# Altium PCB PCB1.PcbDoc
Units mil, origin at the board's own origin, x right, y up, seen from the top; angles counter-clockwise.
Board outline 1181.1 x 984.25 mil, 2 copper layers (Top Layer, Bottom Layer); 18 components, 19 nets, 54 pads, 1 vias.
Unrouted connection lines stored in the file: 1.
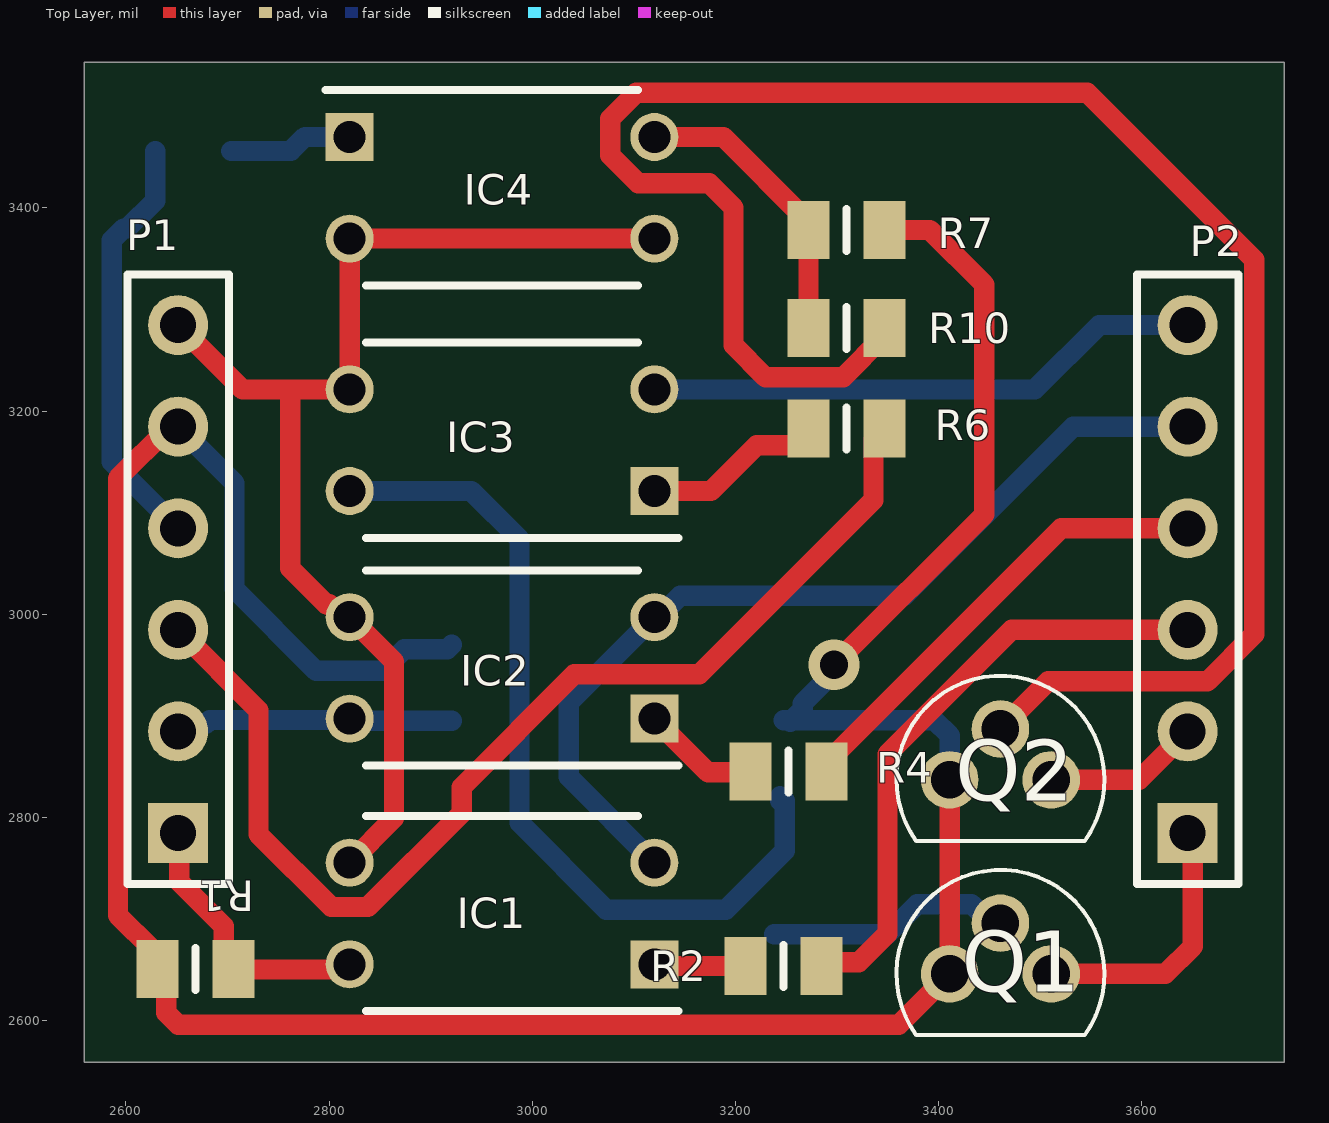
[diagram p0: Top Layer view]
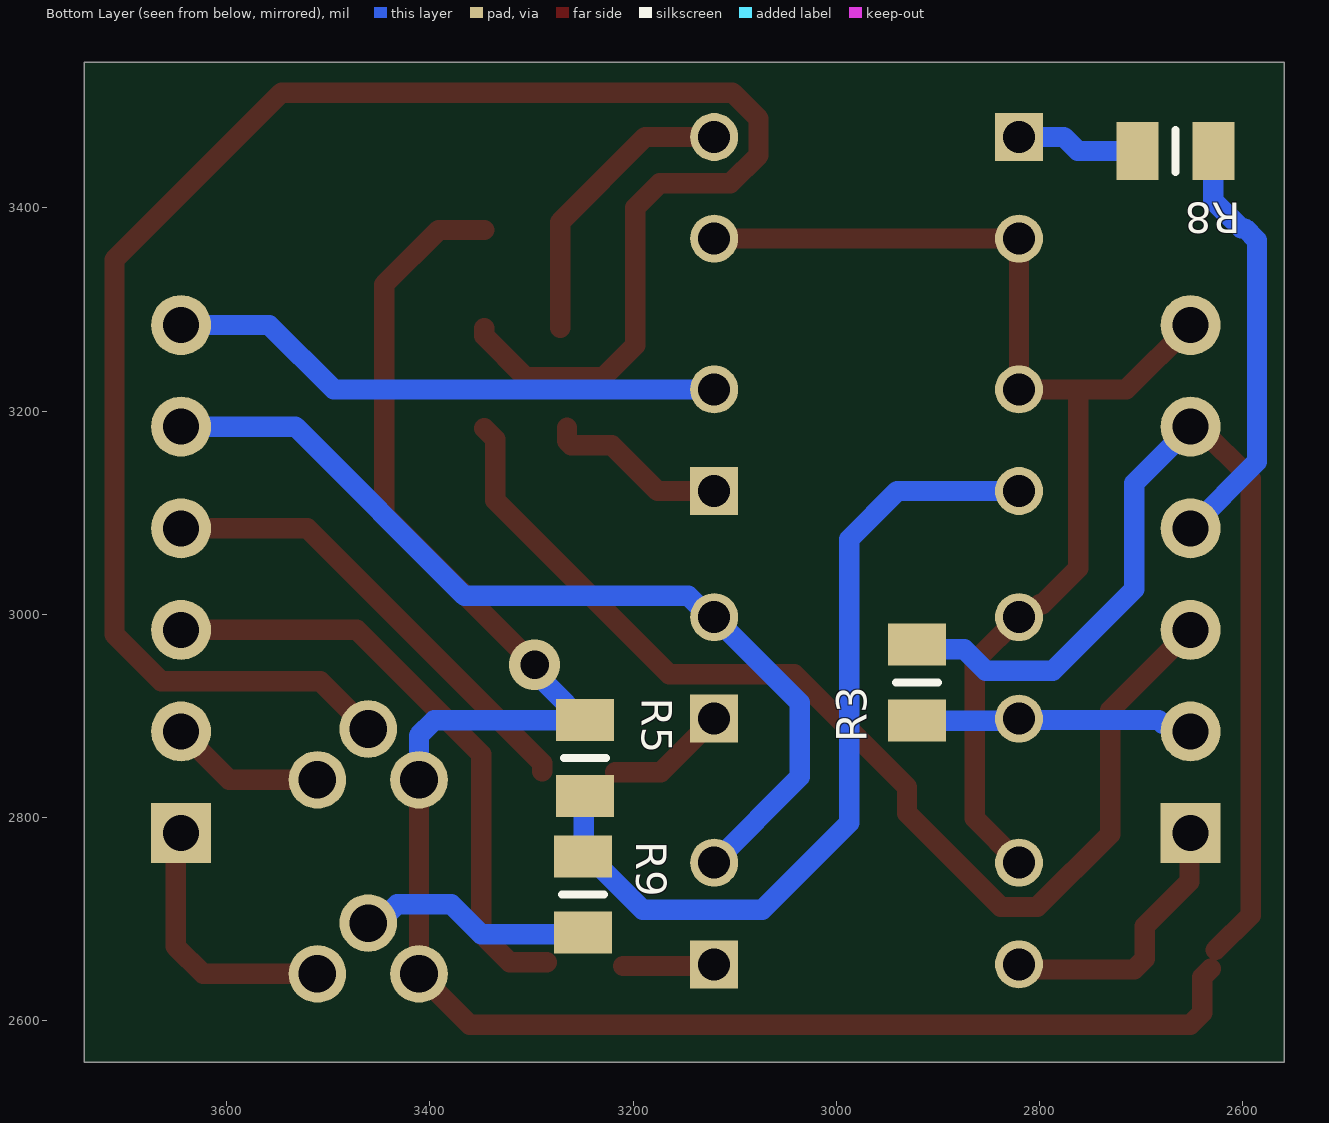
[diagram p1: Bottom Layer view, seen from below]
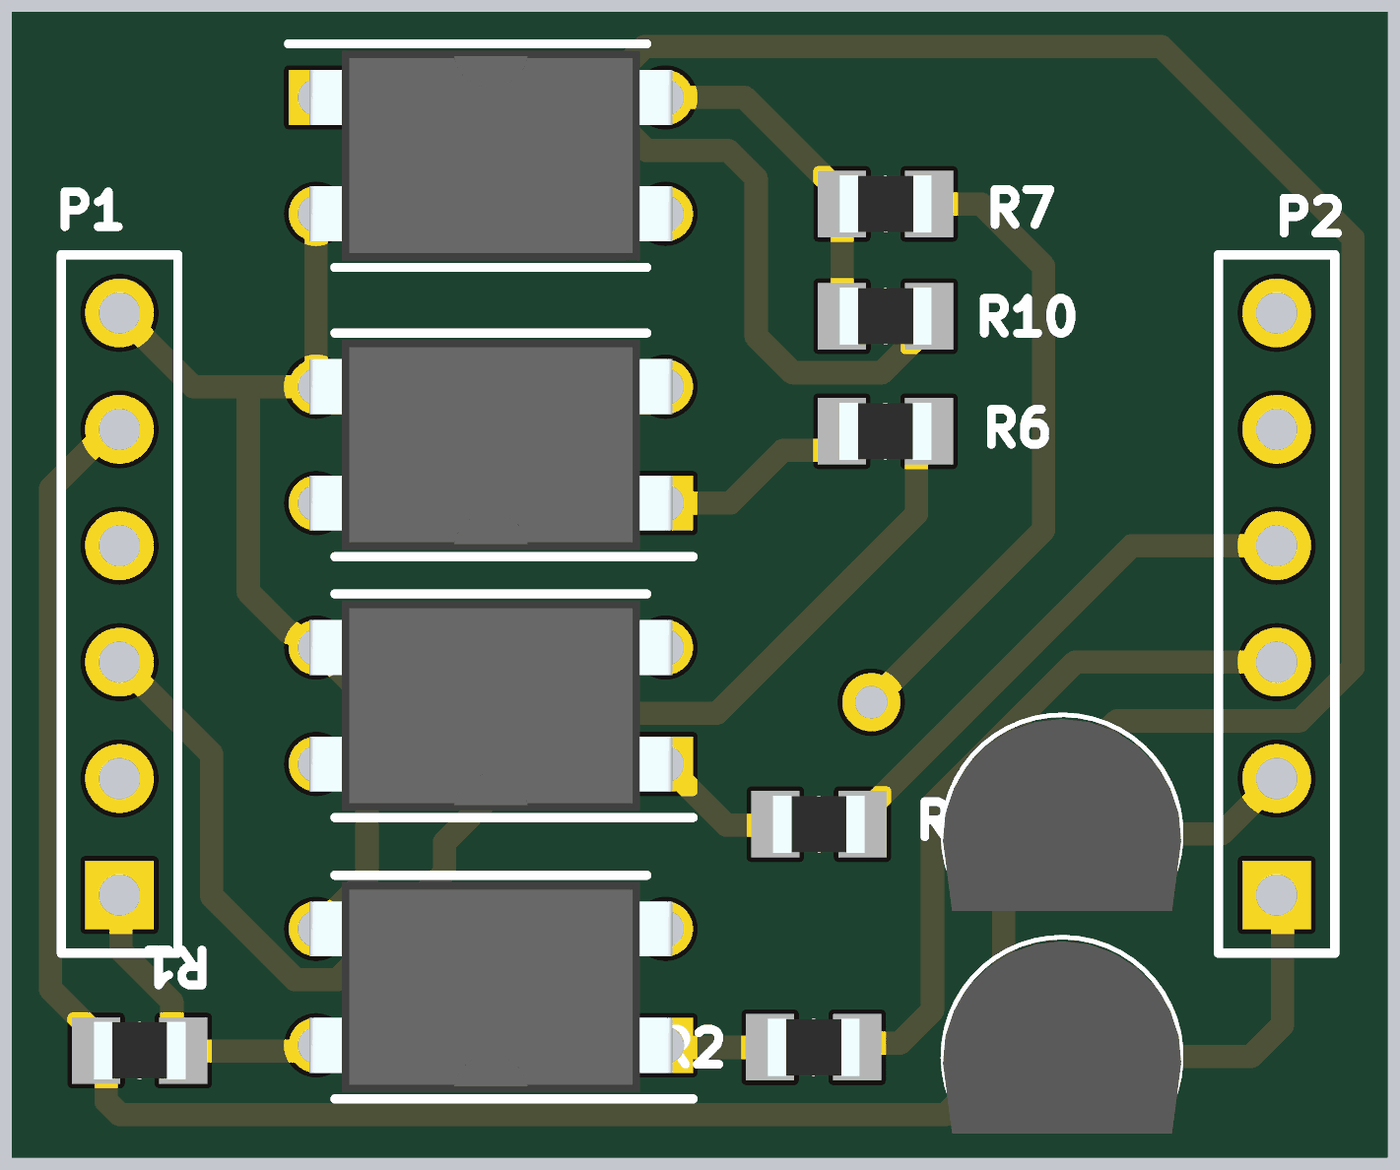
[diagram p2: 3D render of the assembled board from above, using the file's embedded part models]
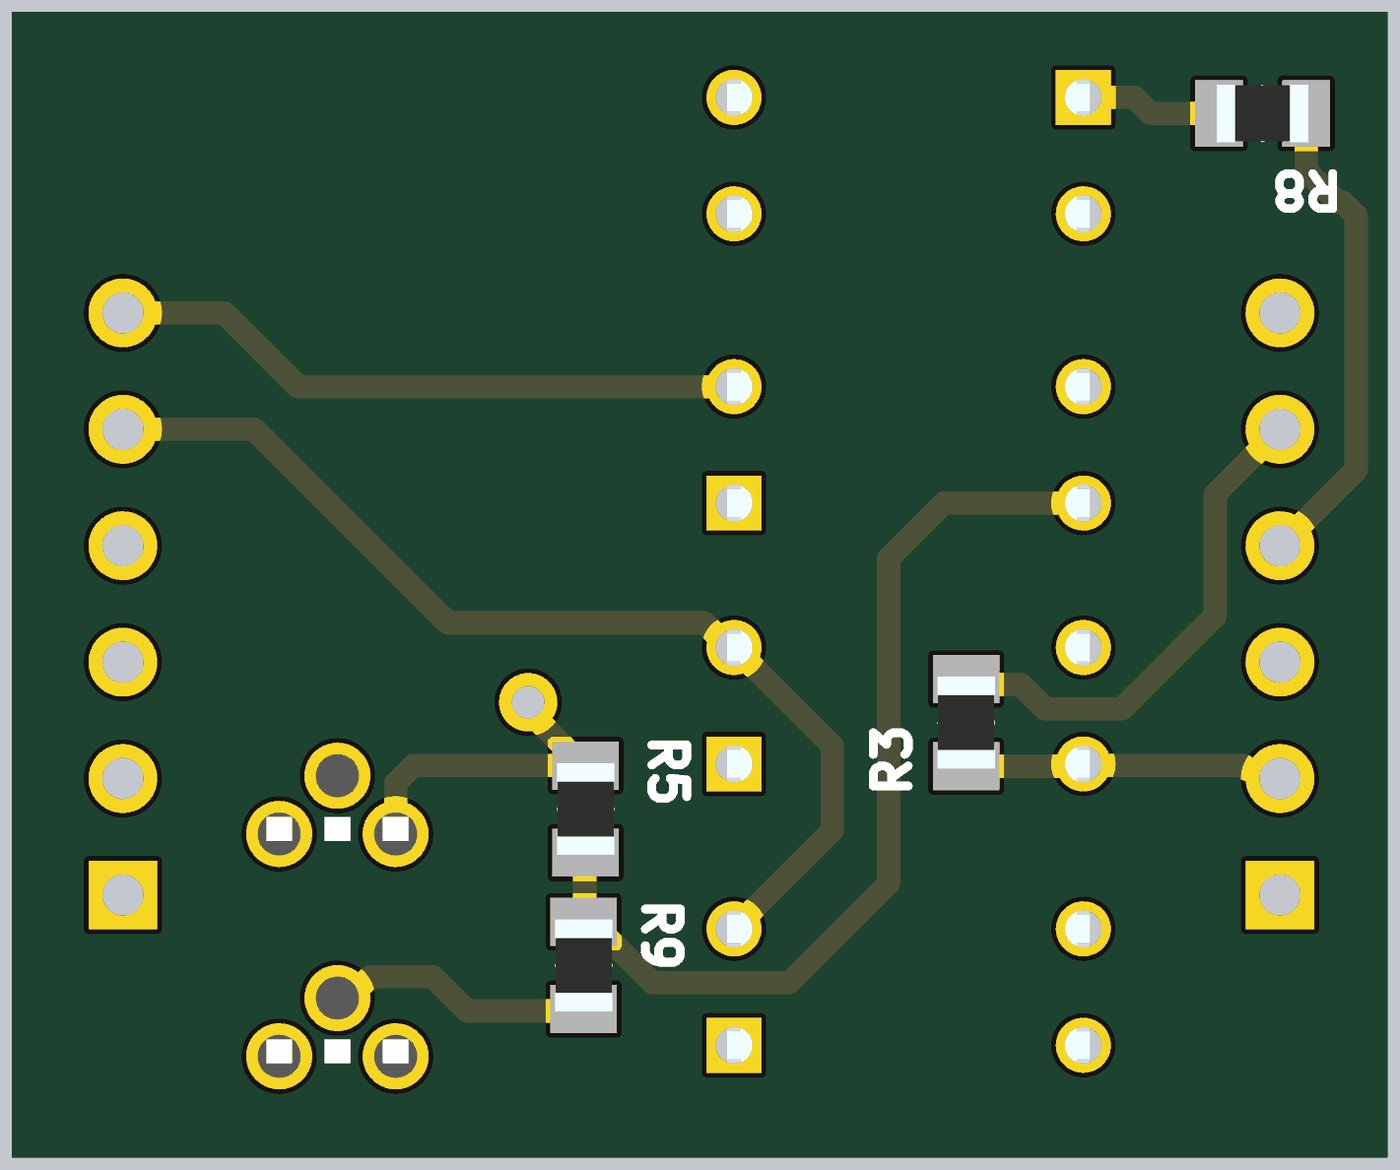
[diagram p3: 3D render of the assembled board from below, using the file's embedded part models]

## Layer stack, top to bottom
Top Solder: solder mask 0.4, Solder Resist, Dk 3.5
Top Layer: signal copper 1.4
Dielectric 1: dielectric 12.6, FR-4, Dk 4.8
Bottom Layer: signal copper 1.4
Bottom Solder: solder mask 0.4, Solder Resist, Dk 3.5

## Board outline
2559.06,2559.06 2559.06,3543.31 3740.16,3543.31 3740.16,2559.06

## Design rules (kind name [scope] priority, off if disabled: settings)
Clearance [All] p1: gap=10 ignorepadtopadclearanceinfootprint=FALSE except(0: Arc-Hole Track-Hole SMDPad-Hole THPad-Hole Via-Hole Fill-Hole Poly-Hole Region-Hole Text-Hole)
PolygonConnect [All] p1: connectstyle=Relief reliefconductorwidth=10 reliefentries=4 polygonreliefangle="90 Angle" airgapwidth=10
RoutingVias [All] p1: holewidth=28 width=50 viastyle="Through Hole" minholewidth=28 minwidth=50 maxholewidth=28 maxwidth=50
SolderMaskExpansion [All] p1: expansion=4 istentingtop=FALSE
Width [All] p1: maxlimit=30 minlimit=10 preferedwidth=20
30 further rules are at their usual default settings.

## Components (designator, comment, footprint, x,y, rotation, side; value= is the part's Value field where it differs from the comment)
IC1 "PC817X2NSZ0F" DIP762W60P254L458H400Q4N 2970.2,2705.57 r180 top
IC2 "PC817X2NSZ0F" DIP762W60P254L458H400Q4N 2970.2,2947.25 r180 top
IC3 "PC817X2NSZ0F" DIP762W60P254L458H400Q4N 2970.2,3171.35 r180 top
IC4 "PC817X2NSZ0F" DIP762W60P254L458H400Q4N 2970.2,3419.82 r0 top
P1 "Header 6" HDR1X6 2651.35,2784.71 r90 top
P2 "Header 6" HDR1X6 3644.99,2784.71 r90 top
Q1 "BC547BG" TO-92_(TO-226) 3410.74,2646.08 r180 top
Q2 "BC547BG" TO-92_(TO-226) 3410.74,2837.1 r180 top
R1 "RN73C2A10KLTDF" RESC2012X65N 2668.72,2651.06 r180 top
R2 "PCF0805R-1K0BI" RESC2012X65N 3247.43,2653.8 r180 top
R3 "RN73C2A10KLTDF" RESC2012X65N 2920.82,2932.71 r90 bottom
R4 "PCF0805R-1K0BI" RESC2012X65N 3251.93,2845.46 r180 top
R5 "RN73C2A10KLTDF" RESC2012X65N 3247.59,2858.44 r90 bottom
R6 "PCF0805R-1K0BI" RESC2012X65N 3309.05,3183.06 r180 top
R7 "RN73C2A10KLTDF" RESC2012X65N 3309.19,3378.27 r0 top
R8 "PCF0805R-1K0BI" RESC2012X65N 2666.32,3456.04 r0 bottom
R9 "PCF0805R-1K0BI" RESC2012X65N 3249.28,2724.19 r270 bottom
R10 "PCF0805R-1K0BI" RESC2012X65N 3309.19,3281.86 r0 top

## Footprints (in the part's own frame and the unit in brackets; to place one, negate y for a bottom-side part, rotate by r counter-clockwise, add the part's x,y. Pads: shape width x height; smd on the part's side, far side on the other; paste and mask are expansions set on the pad)
DIP762W60P254L458H400Q4N [mm]
  rect 1.2x1.2 hole 0.8: 1(-3.81,1.27)
  round 1.2 hole 0.8: 2(-3.81,-1.27) 3(3.81,-1.27) 4(3.81,1.27)
  silkscreen extent -4.41,-2.44 3.4,2.44, body extent -3.96,-2.29 3.96,2.29, height 4
HDR1X6 [mm] "Connector; Header; 6 Position"
  rect 1.5x1.5 hole 0.9: 1(0,0)
  round 1.5 hole 0.9: 2(2.54,0) 3(5.08,0) 4(7.62,0) 5(10.16,0) 6(12.7,0)
  silkscreen extent -1.27,-1.27 13.97,1.27
RESC2012X65N [mm]
  rect 1.05x1.45 smd: 1(-0.95,0) 2(0.95,0)
  silkscreen extent 0,-0.53 0,0.53, body extent -1,-0.63 1,0.63, height 0.65
TO-92_(TO-226) [mm]
  round 1.44 hole 0.94: 1(0,0) 2(-1.27,-1.27) 3(-2.54,0)
  silkscreen extent -3.87,-2.6 1.33,1.53, body extent -3.87,-2.51 1.33,1.68, height 8.33

## Part data
IC1 IC2 IC3 IC4: "Integrated Circuit", Manufacturer_Name="Sharp Microelectronics", Mouser Part Number=N/A, Datasheet Link=https://datasheet.datasheetarchive.com/originals/distributors/Datasheets_SAMA/458e45842a103a05998fcebbd6f7366e.pdf, Height=4mm, Manufacturer_Part_Number=PC817X2NSZ0F, Mouser Price/Stock=https://www.mouser.co.uk/ProductDetail/Sharp-Microelectronics/PC817X2NSZ0F?qs=6kT3pPPHxnU7uYWM8Yy85A%3D%3D
P1 P2: "Header, 6-Pin", LatestRevisionDate=17-Jul-2002, LatestRevisionNote="Re-released for DXP Platform.", Publisher="Altium Limited"
Q1 Q2: "Transistor BJT NPN", Manufacturer_Name=onsemi, Mouser Part Number=N/A, Arrow Part Number=BC547BG, Arrow Price/Stock=http://www.arrow.com/en/products/bc547bg/on-semiconductor, Datasheet Link=https://www.onsemi.com/download/data-sheet/pdf/BC546-D.PDF, Height=5.33mm, Manufacturer_Part_Number=BC547BG, Mouser Price/Stock=http://www.mouser.com/Search/ProductDetail.aspx?qs=NSmgnqlvnz5NIKIycfR5CQ%3d%3d
R1 R3 R5 R7: "Resistor", Manufacturer_Name="TE Connectivity", Mouser Part Number=279-RN73C2A10KLTDF, Datasheet Link=http://docs-europe.electrocomponents.com/webdocs/1488/0900766b814885e5.pdf, Height=0.65mm, Manufacturer_Part_Number=RN73C2A10KLTDF, Mouser Price/Stock=https://www.mouser.co.uk/ProductDetail/TE-Connectivity-Holsworthy/RN73C2A10KLTDF?qs=1Hpg7qxOs69sC8pHBMR1GQ%3D%3D
R2 R4 R6 R8 R9 R10: "Resistor", Manufacturer_Name="TT Electronics", Mouser Part Number=756-PCF0805R1K0BI, Datasheet Link=https://componentsearchengine.com/Datasheets/1/PCF0805-13-10KBT1.pdf, Height=0.65mm, Manufacturer_Part_Number=PCF0805R-1K0BI, Mouser Price/Stock=https://www.mouser.co.uk/ProductDetail/Welwyn-Components-TT-Electronics/PCF0805R-1K0BI?qs=mbEfOQsdCzdnsA0Coprz5g%3D%3D

## Via types
v1: diameter 50, hole 28, Top Layer to Bottom Layer, 1 vias

## Nets (pads, with @x,y where several pads share a name; then routed paths per layer and width w, separated by ;. In a path a pad name is that pad's centre, name@x,y a point inside that pad or via, vN(x,y) a via of type N, cw(c..) or ccw(c..) an arc to the next point about the centre after c; other vN are vias at no path point)
+5: P1.5 Q1.1 Q2.1 R1.2 R3.2 R5.2 R7.2 | length 2869.7
  Top Layer w20: R1.2@2626.4,2669.66 2592.18,2703.89 2592.18,3133.77 2642.73,3184.32 P1.5@2646.29,3184.32 ; R1.2 2639.73,2642.64 2639.73,2607.84 2651.45,2596.13 3360.79,2596.13 3408.52,2643.86 Q1.1@3409.81,2643.86 ; v1(3296.92,2950.27) 3444.88,3098.23 3444.88,3324.68 3391.3,3378.27 R7.2 ; Q1.1 Q2.1
  Bottom Layer w20: P1.5 2706.9,3129.16 2706.9,3024.69 2787.03,2944.56 2853.07,2944.56 2873.99,2965.48 2916.18,2965.48 R3.2 ; R5.2 3395.69,2895.84 3410.74,2880.79 Q2.1 ; R5.2@3253.78,2894.15 3266.14,2906.51 3266.14,2912.26 3296.92,2943.04 v1(3296.92,2950.27)
EXT_GND: IC1.2 IC2.2 P2.5 | length 914
  Bottom Layer w20: IC1.2 3035.84,2839.92 3035.84,2912.89 IC2.2 3124.37,2997.25 3145.54,3018.41 3365.99,3018.41 3532.28,3184.71 P2.5
GND: IC1.3 IC2.3 IC3.2 IC3.3 IC4.2 IC4.3 P1.6 P2.6 | length 1721.1
  Top Layer w20: P1.6 2714.72,3221.35 2761.88,3221.35 ; IC3.3@2814.62,3221.35 2761.88,3221.35 ; IC3.3@2814.62,3224.07 2820.2,3229.65 IC4.2 3116.94,3369.82 IC4.3@3119.47,3372.36 ; IC1.3 2863.82,2799.19 2863.82,2953.62 IC2.3 2812.82,2997.25 2800.09,3009.98 2797.1,3009.98 2761.88,3045.21 2761.88,3221.35
  Bottom Layer w20: IC3.2 3494.62,3221.35 3557.98,3284.71 P2.6
IN_1: P2.3 R2.1 | length 599.2
  Top Layer w20: R2.1@3284.84,2657.48 3321.49,2657.48 3349.51,2685.5 3349.51,2862.21 3472.01,2984.71 P2.3
IN_2: P2.4 R4.1 | length 453.5
  Top Layer w20: R4.1 3289.33,2853.34 3520.7,3084.71 3634.59,3084.71 P2.4@3637.79,3081.5
IN_TOM_1: IC1.4 P1.1 R1.1 | length 262.1
  Top Layer w20: P1.1 2652.43,2783.63 2652.43,2736.89 2696.37,2692.95 2696.37,2660.81 2706.7,2650.48 2809.44,2650.48 IC1.4@2810.98,2652.02
IN_TOM_2: IC2.4 P1.2 R3.1 | length 272.8
  Bottom Layer w20: P1.2 2658.83,2892.18 2678.86,2892.18 2682.6,2895.91 IC2.4@2818.87,2895.91 ; IC2.4@2820.2,2895.31 R3.1
NetIC1_1: IC1.1 R2.2 | length 90.6
  Top Layer w20: IC1.1 3121.96,2653.8 R2.2
NetIC2_1: IC2.1 R4.2 | length 119.5
  Top Layer w20: IC2.1 3172.83,2844.62 R4.2@3217.91,2844.62
NetIC3_1: IC3.1 R6.2 | length 178.3
  Top Layer w20: IC3.1 3175.81,3121.35 3220.98,3166.52 3260.98,3166.52 3265.14,3170.67 R6.2@3265.14,3183.6
NetIC3_4: IC3.4 R5.1 R9.1 | length 846.6
  Bottom Layer w20: IC3.4@2820.23,3121.38 2940.02,3121.38 2987.43,3073.97 2987.43,2794.76 3072.83,2709.35 3190.37,2709.35 3248.44,2767.42 3248.44,2816.46 3243.86,2821.04 R5.1@3243.86,2816.46
NetIC4_1: IC4.1 R8.2 | length 122.2
  Bottom Layer w20: R8.2 2762.47,3456.04 2776.25,3469.82 IC4.1
NetIC4_4: IC4.4 R7.1 R10.1 | length 290.5
  Top Layer w20: IC4.4 3188.11,3469.82 3271.79,3386.14 R7.1 R10.1
NetQ1_2: Q1.2 R9.2 | length 242.7
  Bottom Layer w20: R9.2@3237.92,2685.07 3349.35,2685.07 3378.9,2714.62 3432.27,2714.62 3450.81,2696.08 Q1.2
NetQ2_2: Q2.2 R10.2 | length 1870.5
  Top Layer w20: R10.2 3346.6,3273.99 3305.93,3233.32 3229.47,3233.32 3198.02,3264.77 3198.02,3400.16 3174.03,3424.16 3104.17,3424.16 3076.58,3451.75 3076.58,3487.89 3102.13,3513.44 3546.14,3513.44 3710.49,3349.1 3710.49,2980.16 3664.56,2934.23 3507.87,2934.23 Q2.2
OUT_1: P2.1 Q1.3 | length 264.3
  Top Layer w20: Q1.3 3623.16,2646.08 3650.07,2672.99 3650.07,2779.62 P2.1
OUT_2: P2.2 Q2.3 | length 150.5
  Top Layer w20: Q2.3 3597.38,2837.1 3635.94,2875.66 P2.2@3635.94,2884.96
OUT_FM_1: P1.3 R6.1 | length 1125
  Top Layer w20: P1.3 2730.48,2905.58 2730.48,2783.59 2802.13,2711.94 2838.27,2711.94 2930.42,2804.1 2930.42,2829.98 3041.31,2940.87 3164.35,2940.87 3335.79,3112.31 3335.79,3172.4 R6.1
OUT_FM_2: P1.4 R8.1 | length 418.5
  Bottom Layer w20: R8.1 2628.91,3407.16 2601.53,3379.78 2597.69,3379.78 2585.97,3368.07 2585.97,3150.09 P1.4

## Silkscreen, mask and mechanical layers (free items; w line width, h text height)
Mechanical 1:
  the board outline again, w10